# EAGLE board schema_21 (EAGLE 9.0.0)
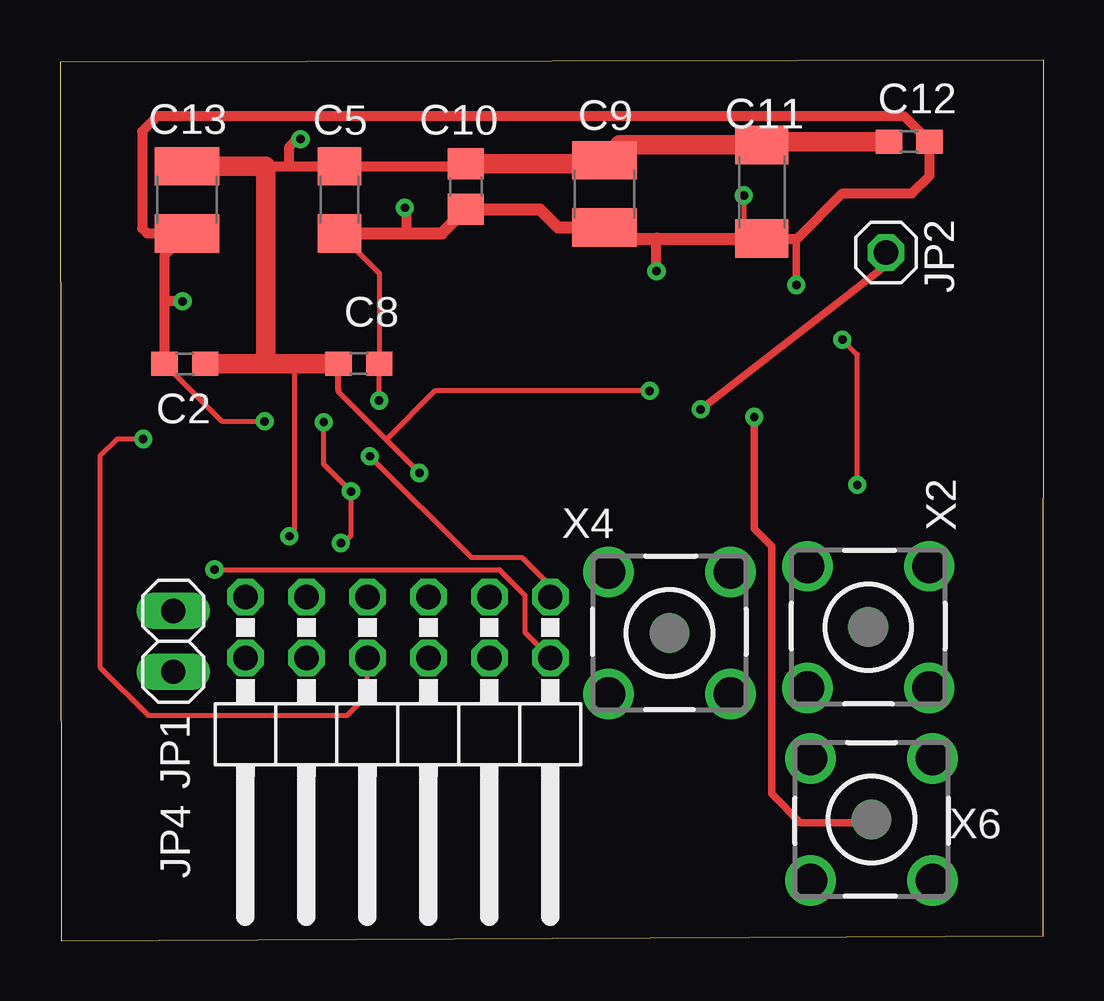
[diagram p0: board, top side]
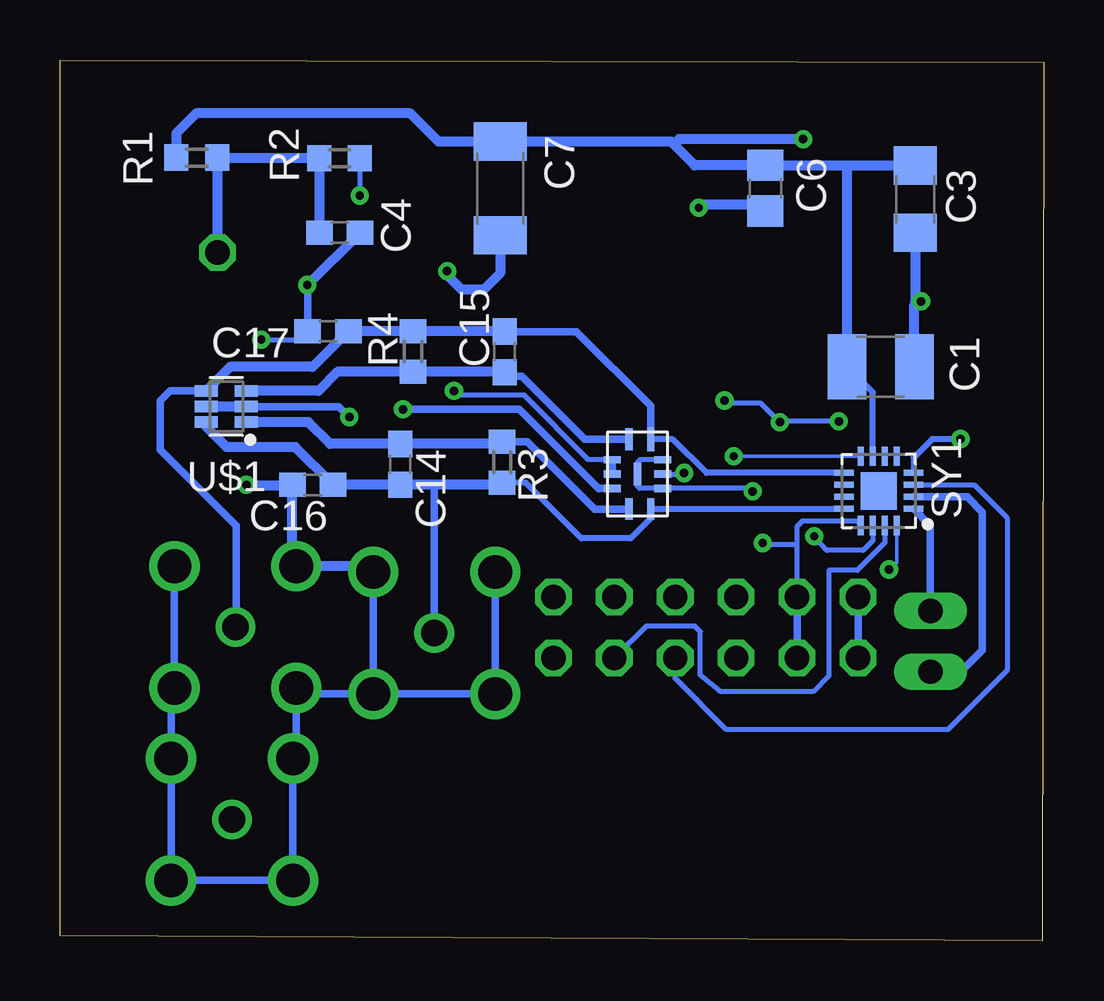
[diagram p1: board, bottom side, seen from below]

Size 40.98 x 36.69 mm. Coordinates in mm from the lower left corner, seen from the top.
Outline: 0.06,0 40.98,0.21 40.98,36.69 0,36.61 0.06,0
Copper layers (1*16): Top 0.035mm / dielectric 1.5mm / Bottom 0.035mm
Design rules "default": minimum track width 6mil, minimum drill 0.35mm, track to track 6mil, track to pad 6mil, pad to pad 6mil, via to via 6mil, smd to smd 6mil, copper to edge 40mil, drill to drill 6mil, minimum pad ring 10mil, minimum via ring 8mil, stop-mask expansion 4mil, vias tented up to drill 0mil, thermal gap 10mil

## Footprints (pad centres in the part's own frame; a part is rotated, then mirrored left to right if it is on the bottom)
C1210 = smd 1.6 x 2.7: 1 -1.4,0; 2 1.4,0
C0603 = smd 1.1 x 1: 1 -0.85,0; 2 0.85,0
C1206 = smd 1.6 x 1.8: 1 -1.4,0; 2 1.4,0
C0805 = smd 1.3 x 1.5: 1 -0.95,0; 2 0.95,0
C1808 = smd 1.6 x 2.2: 1 -1.95,0; 2 1.95,0
1X02 = drill 1.016 long: 1 -1.27,0; 2 1.27,0
1X01 = drill 1.016 octagon: 1 0,0
2X06/90 = drill 1.016 octagon: 1 -6.35,-6.35; 2 -6.35,-3.81; 3 -3.81,-6.35; 4 -3.81,-3.81; 5 -1.27,-6.35; 6 -1.27,-3.81; 7 1.27,-6.35; 8 1.27,-3.81; 9 3.81,-6.35; 10 3.81,-3.81; 11 6.35,-6.35; 12 6.35,-3.81
LTC6409_1 = smd 0.9 x 0.3: IN+ -1.45,-0.35; IN- 1.45,-0.35; OUT+ 1.45,0.55 | smd 1 x 0.3: OUT- -1.45,0.55 | smd 0.3 x 0.7: SHDN -0.6,-1.05; V+ 0,-1.05; V++ 0,1.05; V- -0.6,1.05; V-- 0.6,1.05; VOCM 0.6,-1.05 | smd 0.95 x 0.3: V--- 0,0
R0603 = smd 1 x 1.1: 1 -0.85,0; 2 0.85,0
QFN50P300X300X90-16 = smd 0.81 x 0.25: 1 -1.445,0.75; 2 -1.445,0.25; 3 -1.445,-0.25; 4 -1.445,-0.75; 9 1.445,-0.75; 10 1.445,-0.25; 11 1.445,0.25; 12 1.445,0.75 | smd 0.25 x 0.81: 5 -0.75,-1.445; 6 -0.25,-1.445; 7 0.25,-1.445; 8 0.75,-1.445; 13 0.75,1.445; 14 0.25,1.445; 15 -0.25,1.445; 16 -0.75,1.445 | smd 1.5 x 1.55: PIN#1 0,0
SOTFL65P210X100-6 = smd 0.956 x 0.472: 1 -0.836,0.65; 2 -0.836,0; 3 -0.836,-0.65; 4 0.836,-0.65; 5 0.836,0; 6 0.836,0.65
BU-SMB-V = drill 1.1: 1 0,0 | drill 1.4: 2 -2.54,2.54; 3 2.54,2.54; 4 2.54,-2.54; 5 -2.54,-2.54

## Placement (x,y rotation side)
C1  10u  [C1210]  6.79,23.91 0 bottom
C2  0.1u  [C0603]  5.2,24.04 180 top
C3  1000p  [C1206]  5.35,30.9 270 bottom
C4  0.1u  [C0603]  29.33,29.5 0 bottom
C5  1000p  [C1206]  11.64,30.87 270 top
C6  100p  [C0805]  11.59,31.35 270 bottom
C7  0.01u  [C1808]  22.64,31.34 270 bottom
C8  0.1u  [C0603]  12.45,24.04 0 top
C9  0.47u  [C1210]  22.69,31.12 270 top
C10  100p  [C0805]  16.92,31.42 270 top
C11  0.01u  [C1808]  29.24,31.2 270 top
C12  0.1u  [C0603]  35.38,33.29 0 top
C13  0.47u  [C1210]  5.29,30.87 270 top
C14  10p  [C0603]  26.81,19.85 270 bottom
C15  10p  [C0603]  22.46,24.53 90 bottom
C16  10p  [C0603]  30.45,18.99 180 bottom
C17  10p  [C0603]  29.81,25.4 180 bottom
JP1  [1X02]  4.72,12.47 270 top
JP2  0  [1X01]  34.42,28.67 0 top
JP4  0  [2X06/90]  14.08,7.97 180 top
LTC2  0  [LTC6409_1]  16.92,19.44 270 bottom
R1  500  [R0603]  35.29,32.63 180 bottom
R2  500  [R0603]  29.34,32.6 180 bottom
R3  500  [R0603]  22.56,19.93 270 bottom
R4  500  [R0603]  26.28,24.54 90 bottom
SY1  SY89873LN  [QFN50P300X300X90-16]  6.87,18.74 180 bottom
U$1  UM6K34N1  [SOTFL65P210X100-6]  34.05,22.26 180 bottom
X2  BU-SMB-V  [BU-SMB-V]  33.68,13.06 0 top
X4  BU-SMB-V  [BU-SMB-V]  25.39,12.82 0 top
X6  BU-SMB-V  [BU-SMB-V]  33.82,5.05 180 top

## Library data of the parts
C1-C3 C5-C13 = rcl
C4 C14-C17 = rcl; SPICEPREFIX: C
JP1 JP2 JP4 = pinhead
LTC2 SY1 U$1 = mylibrary
R1 R2 = rcl; SPICEPREFIX: R
R3 R4 = resistor
X2 X4 X6 = con-coax; OC_FARNELL: unknown; OC_NEWARK: unknown

## Nets
0: C1.2 C2.2 C3.2 C4.2 C5.2 C6.2 C7.2 C8.2 C9.2 C10.2 C11.2 C12.2 C13.2 C16.2 C17.2 JP4.9 JP4.10 LTC2.V- LTC2.V-- LTC2.V--- R2.1 SY1.13 X2.2 X2.3 X2.4 X2.5 X4.2 X4.3 X4.4 X4.5 X6.2 X6.3 X6.4 X6.5
+3V3: C1.1 C2.1 C3.1 C5.1 C6.1 C7.1 C8.1 C9.1 C10.1 C11.1 C12.1 C13.1 LTC2.SHDN LTC2.V+ LTC2.V++ R1.2 SY1.7 SY1.14
DVDD: JP4.11 JP4.12
IN: C14.2 C16.1 LTC2.OUT+ R3.2 SY1.12 U$1.6 X4.1
INN: C15.2 C17.1 LTC2.OUT- R4.2 SY1.9 U$1.4 X2.1
LIN+: C15.1 LTC2.IN+ R4.1 U$1.3
LIN-: C14.1 LTC2.IN- R3.1 U$1.1
QB0: JP1.1 SY1.1
QB0N: JP1.2 SY1.2
QB1: JP4.6 SY1.3
QB1N: JP4.8 SY1.4
RESET: JP4.1 SY1.8
S0: JP4.2 SY1.16
S1: JP4.4 SY1.15
VCTRL: U$1.2 U$1.5 X6.1
VOCM: C4.1 JP2.1 LTC2.VOCM R1.1 R2.2

## Tracks (layer width: path | path; a pad name or v marks a point on that pad's centre or on a via)
0  (via drill 0.35)
  Top 0.2: v11.7,16.57 11.74,16.61 11.86,16.61 12.13,16.87 v12.13,18.72 10.99,19.86 v10.99,21.6 v10.99,21.61 | v13.3,22.51 C8.2 | v33.22,18.99 33.22,24.42 32.61,25.03 32.61,25.04 v32.6,25.05 | C2.2 6.75,21.65 8.52,21.65 v8.53,21.64 | 28.36,29.25 28.5,29.39 v28.5,31.05
  Top 0.203: C5.2 13.3,27.81 C8.2
  Top 0.305: v30.68,27.32 30.68,29.25
  Top 0.406: C11.2 30.68,29.25 30.72,29.25 32.6,31.13 35.5,31.13 36.23,31.87 C12.2 35.18,34.35 4.04,34.35 3.42,33.73 3.42,29.68 3.63,29.47 C13.2 4.35,28.53 4.35,26.69 | 4.35,26.69 C2.2 | v14.37,30.54 14.44,30.47 14.44,29.47 | v5.11,26.64 4.4,26.64 4.35,26.69 | v24.85,27.89 24.85,29.24 24.87,29.25
  Top 0.508: 4.99,29.16 C13.2 | C5.2 14.44,29.47 15.91,29.47 C10.2 19.99,30.47 20.75,29.72 C9.2 23.15,29.25 24.87,29.25 28.36,29.25 C11.2
  Bottom 0.2: JP4.9 10.27,16.51 | 10.27,16.51 10.27,17.26 10.04,17.5 7.82,17.5 SY1.13 | 12.11,18.68 12.13,18.7 v12.13,18.72 12.25,18.84 LTC2.V-- 16.83,18.84 16.92,18.93 LTC2.V--- 16.92,19.92 16.8,20.04 LTC2.V- | v11.7,16.57 11.64,16.51 10.27,16.51 | v13.3,22.51 13.18,22.39 11.78,22.39 v10.99,21.61 10.96,21.64 v8.53,21.64 | 33.15,18.99 33.18,18.96 v33.22,18.99 | v32.6,25.05 31.02,25.05 C17.2 | R2.1 28.49,31.21 28.49,31.2 v28.49,31.06 v28.5,31.05
  Bottom 0.305: JP4.9 JP4.10 | X4.4 X4.5 X4.2 | X4.3 X4.4 | X4.4 30.9,10.28 X2.5 31.14,7.73 X6.4 X6.3 X6.2 X6.5 36.36,10.38 X2.4 X2.3 | C17.2 30.66,27.19 30.66,27.2 30.68,27.23 v30.68,27.32
  Bottom 0.406: X4.3 28.17,15.6 X2.2 31.3,15.76 C16.2 31.34,18.96 33.18,18.96 | C6.2 11.86,30.67 14.24,30.67 v14.37,30.54 | C1.2 5.39,26.49 5.31,26.57 | v5.11,26.64 5.24,26.64 5.31,26.57 | C7.2 22.64,27.81 23.33,27.13 24.25,27.13 24.85,27.73 v24.85,27.89 | C3.2 5.35,26.6 5.31,26.57 | C4.2 30.66,27.32 v30.68,27.32
+3V3  (via drill 0.35)
  Top 0.2: v14.98,19.49 13.59,20.87 | 13.59,20.87 11.6,22.86 11.6,22.94 | v24.57,22.91 15.62,22.91 13.59,20.87
  Top 0.203: v9.56,16.85 9.78,17.15 9.78,24.04
  Top 0.254: 11.6,22.94 C8.1
  Top 0.406: 8.56,32.27 9.56,32.27 | 9.56,32.27 C5.1 16.81,32.27 | 9.56,32.27 9.56,33.08 9.87,33.4 v10.02,33.4
  Top 0.813: C13.1 8.56,32.27 8.56,24.2 8.73,24.04 | 16.81,32.27 C10.1 22.54,32.37 C9.1 23.32,33.15 C11.1 29.38,33.29 C12.1 | C2.1 8.73,24.04 | 8.73,24.04 9.78,24.04 C8.1
  Bottom 0.2: LTC2.V++ 15.02,19.44 v14.98,19.49 | 24.37,22.91 v24.57,22.91 24.4,22.74 21.66,22.74 18.97,20.04 LTC2.SHDN
  Bottom 0.203: SY1.14 7.12,16.67 7.52,16.26 9.04,16.26 9.5,16.77 v9.56,16.85
  Bottom 0.254: SY1.7 7.12,22.85 C1.1
  Bottom 0.305: LTC2.SHDN LTC2.V+
  Bottom 0.406: C3.1 8.11,32.3 | R1.2 36.14,33.64 35.31,34.47 26.39,34.47 25.21,33.29 C7.1 15.53,33.29 15.41,33.18 | C1.1 8.19,32.22 8.11,32.3 | 15.41,33.18 14.54,32.3 C6.1 8.11,32.3 | v10.02,33.4 15.19,33.4 15.41,33.18
DVDD
  Bottom 0.305: JP4.11 JP4.12
IN
  Bottom 0.254: SY1.12 LTC2.OUT+ 16.37,17.6 17.21,16.76 19.26,16.76 21.58,19.08 R3.2
  Bottom 0.305: LTC2.OUT+ | X4.1 25.39,18.93 25.32,19
  Bottom 0.406: R3.2 22.65,19 25.32,19 C14.2 | C14.2 26.85,18.96 | C14.2 C16.1 31.18,20.57 34.04,20.57 34.89,21.42 U$1.6
INN
  Bottom 0.254: SY1.9 14.04,19.49 15.44,20.89 LTC2.OUT-
  Bottom 0.305: LTC2.OUT- 16.37,22.28 19.47,25.37 C15.2 | U$1.4 36.39,22.91 36.8,22.5 36.8,20.45 33.64,17.29 33.64,13.1 X2.1
  Bottom 0.406: C15.2 26.26,25.38 R4.2 C17.1 30.46,23.9 33.89,23.9 U$1.4
LIN+
  Bottom 0.305: 22.6,23.66 22.63,23.69 | C15.1 22.3,23.52 21.74,23.52 19.11,20.89 LTC2.IN+
  Bottom 0.406: C15.1 22.47,23.69 22.63,23.69 R4.1 29.42,23.69 30.21,22.91 U$1.3
LIN-
  Bottom 0.305: 22.55,20.76 R3.1 21.52,20.78 18.71,17.97 17.29,17.97 LTC2.IN-
  Bottom 0.406: R3.1 22.65,20.7 C14.1 29.73,20.7 30.64,21.61 U$1.1
QB0
  Bottom 0.305: SY1.1 4.72,17.29 JP1.1
QB0N
  Bottom 0.305: SY1.2 3.19,18.49 2.56,17.86 2.56,12.1 3.5,11.16 3.54,11.2 JP1.2
QB1
  Bottom 0.2: SY1.3 2.89,18.99 1.52,17.62 1.52,11.26 3.99,8.8 13.21,8.8 15.35,10.93 JP4.6
  Bottom 0.254: SY1.3
QB1N  (via drill 0.35)
  Top 0.2: v3.47,20.9 2.38,20.9 1.66,20.19 1.66,11.4 3.67,9.39 11.97,9.39 12.81,10.23 JP4.8
  Bottom 0.254: v3.47,20.9 4.64,20.9 5.42,20.12 SY1.4
RESET  (via drill 0.35)
  Top 0.2: v12.91,20.19 17.13,15.97 19.25,15.97 20.43,14.79 JP4.1
  Bottom 0.152: SY1.8 12.9,20.18 12.91,20.17 | 12.93,20.16 12.91,20.17 | 12.91,20.17 v12.91,20.19
S0  (via drill 0.35)
  Top 0.2: v6.44,15.46 18.3,15.46 19.37,14.4 19.37,12.84 JP4.2
  Bottom 0.152: SY1.16 6.12,15.75 v6.44,15.46
S1
  Bottom 0.2: SY1.15 6.62,16.58 7.76,15.43 8.95,15.43 8.95,11.03 9.6,10.38 13.47,10.38 13.51,10.42 14.3,11.05 14.3,12.87 14.54,13.11 16.56,13.11 JP4.4
VCTRL  (via drill 0.35)
  Top 0.305: v28.93,21.82 28.93,17.15 29.65,16.43 29.65,6.12 30.85,4.92 33.69,4.92 X6.1
  Bottom 0.305: U$1.2 29.37,22.26 v28.93,21.82
  Bottom 0.406: U$1.2 U$1.5
VOCM  (via drill 0.35)
  Top 0.305: v26.69,22.14 34.42,28.14 JP2.1
  Bottom 0.305: v26.69,22.14 21.85,22.14 18.53,18.83 18.52,18.84 LTC2.VOCM
  Bottom 0.406: JP2.1 34.44,28.69 R1.1 30.22,32.63 R2.2 30.19,29.51 C4.1